# EAGLE board Nu6509_v2 (EAGLE 7.7.0)
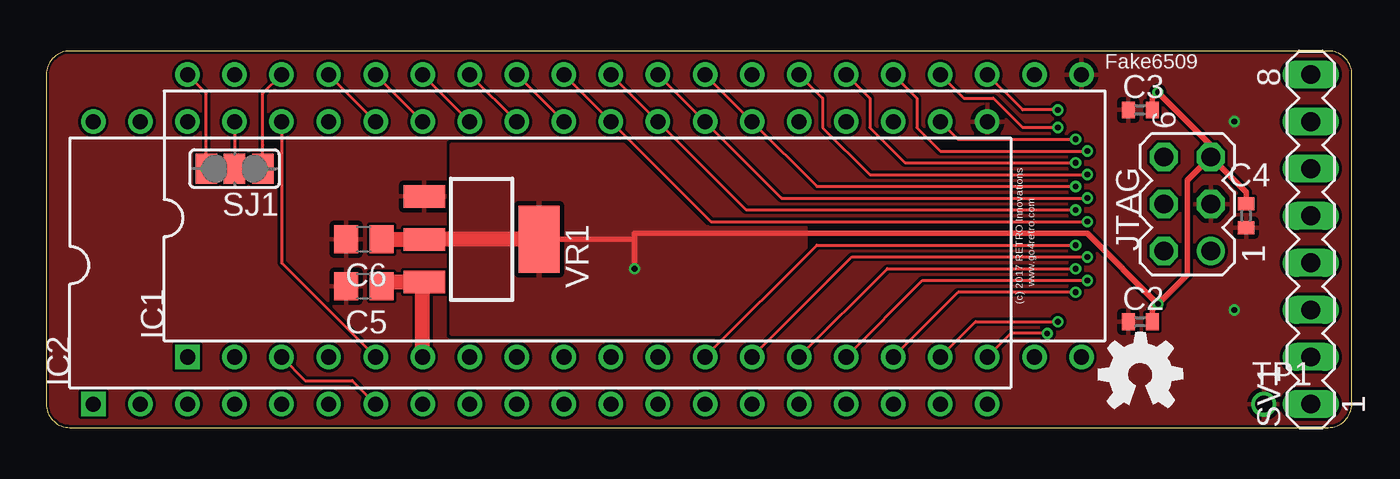
[diagram p0: board, top side]
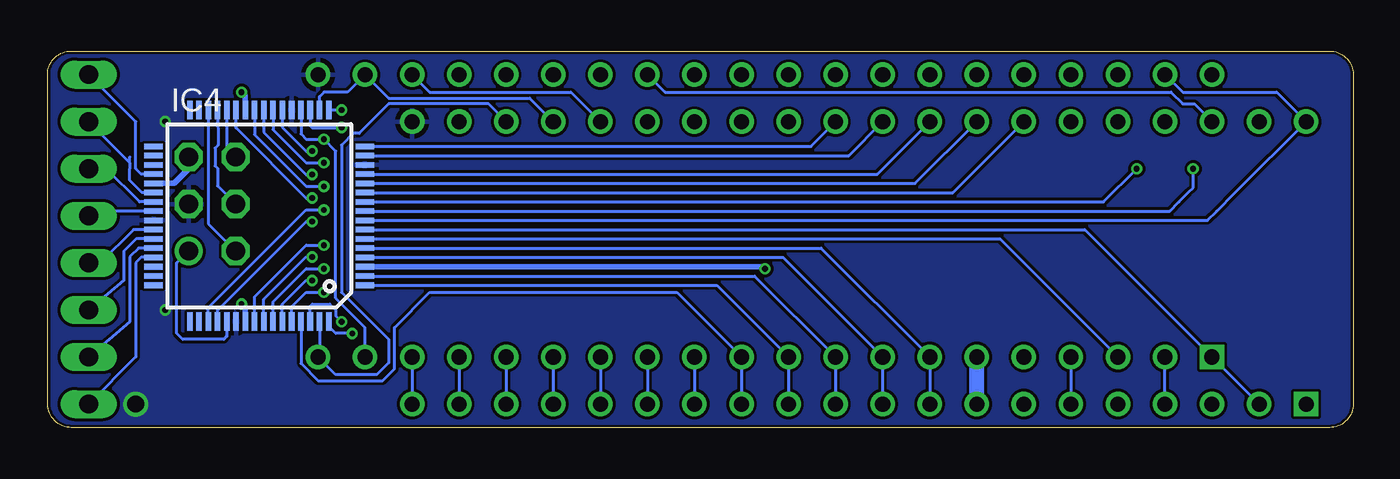
[diagram p1: board, bottom side, seen from below]

Size 70.48 x 20.32 mm. Coordinates in mm from the lower left corner, seen from the top.
Outline: 0,19.05 0,1.27 arc90 1.27,0 69.2,0 arc90 70.47,1.27 70.48,19.05 arc90 69.21,20.32 1.27,20.32 arc90 0,19.05
Copper layers (1*16): Top 0.035mm / dielectric 1.5mm / Bottom 0.035mm
Design rules "hackvana": minimum track width 6mil, minimum drill 0.3mm, track to track 6mil, track to pad 6mil, pad to pad 6mil, via to via 6mil, smd to smd 0mil, copper to edge 6mil, drill to drill 6mil, minimum pad ring 10mil, minimum via ring 6mil, stop-mask expansion 2mil, vias tented up to drill 100mil, thermal gap 10mil

## Footprints (pad centres in the part's own frame; a part is rotated, then mirrored left to right if it is on the bottom)
C0402 = smd 0.7 x 0.9: 1 -0.65,0; 2 0.65,0
C0805 = smd 1.3 x 1.5: 1 -0.95,0; 2 0.95,0
DIL40-ROUNDPAD = drill 0.813 square: 1 -24.13,-7.62 | drill 0.813: 2 -21.59,-7.62; 3 -19.05,-7.62; 4 -16.51,-7.62; 5 -13.97,-7.62; 6 -11.43,-7.62; 7 -8.89,-7.62; 8 -6.35,-7.62; 9 -3.81,-7.62; 10 -1.27,-7.62; 11 1.27,-7.62; 12 3.81,-7.62; 13 6.35,-7.62; 14 8.89,-7.62; 15 11.43,-7.62; 16 13.97,-7.62; 17 16.51,-7.62; 18 19.05,-7.62; 19 21.59,-7.62; 20 24.13,-7.62; 21 24.13,7.62; 22 21.59,7.62; 23 19.05,7.62; 24 16.51,7.62; 25 13.97,7.62; 26 11.43,7.62; 27 8.89,7.62; 28 6.35,7.62; 29 3.81,7.62; 30 1.27,7.62; 31 -1.27,7.62; 32 -3.81,7.62; 33 -6.35,7.62; 34 -8.89,7.62; 35 -11.43,7.62; 36 -13.97,7.62; 37 -16.51,7.62; 38 -19.05,7.62; 39 -21.59,7.62; 40 -24.13,7.62
VQFP64 = smd 1 x 0.3: 1 -5.7,3.75; 2 -5.7,3.25; 3 -5.7,2.75; 4 -5.7,2.25; 5 -5.7,1.75; 6 -5.7,1.25; 7 -5.7,0.75; 8 -5.7,0.25; 9 -5.7,-0.25; 10 -5.7,-0.75; 11 -5.7,-1.25; 12 -5.7,-1.75; 13 -5.7,-2.25; 14 -5.7,-2.75; 15 -5.7,-3.25; 16 -5.7,-3.75; 33 5.7,-3.75; 34 5.7,-3.25; 35 5.7,-2.75; 36 5.7,-2.25; 37 5.7,-1.75; 38 5.7,-1.25; 39 5.7,-0.75; 40 5.7,-0.25; 41 5.7,0.25; 42 5.7,0.75; 43 5.7,1.25; 44 5.7,1.75; 45 5.7,2.25; 46 5.7,2.75; 47 5.7,3.25; 48 5.7,3.75 | smd 0.3 x 1: 17 -3.75,-5.7; 18 -3.25,-5.7; 19 -2.75,-5.7; 20 -2.25,-5.7; 21 -1.75,-5.7; 22 -1.25,-5.7; 23 -0.75,-5.7; 24 -0.25,-5.7; 25 0.25,-5.7; 26 0.75,-5.7; 27 1.25,-5.7; 28 1.75,-5.7; 29 2.25,-5.7; 30 2.75,-5.7; 31 3.25,-5.7; 32 3.75,-5.7; 49 3.75,5.7; 50 3.25,5.7; 51 2.75,5.7; 52 2.25,5.7; 53 1.75,5.7; 54 1.25,5.7; 55 0.75,5.7; 56 0.25,5.7; 57 -0.25,5.7; 58 -0.75,5.7; 59 -1.25,5.7; 60 -1.75,5.7; 61 -2.25,5.7; 62 -2.75,5.7; 63 -3.25,5.7; 64 -3.75,5.7
MA03-2 = drill 1.016: 1 -2.54,-1.27 | drill 1.016 octagon: 2 -2.54,1.27; 3 0,-1.27; 4 0,1.27; 5 2.54,-1.27; 6 2.54,1.27
SJ_2 = smd 1.168 x 1.6: 1 -1.524,0; 2 0,0; 3 1.524,0
MA08-1 = drill 1.016 long: 1 -8.89,0; 2 -6.35,0; 3 -3.81,0; 4 -1.27,0; 5 1.27,0; 6 3.81,0; 7 6.35,0; 8 8.89,0
B1,27 = smd 1.27 x 1.27: TP 0,0
SOT223 = smd 1.219 x 2.235: 1 -2.311,-3.099; 2 0,-3.099; 3 2.311,-3.099 | smd 3.6 x 2.2: 4 0,3.099

## Placement (x,y rotation side)
C2  .1  [C0402]  59.05,5.71 180 top
C3  .1  [C0402]  59.05,17.14 180 top
C4  .1  [C0402]  64.77,11.43 270 top
C5  10  [C0805]  17.14,7.62 180 top
C6  22  [C0805]  17.14,10.16 180 top
GOLD_ORB_SM1  Open Source Hardware  [OSHW_5MM]  59.05,2.86 0 top
IC1  6509  [DIL40-ROUNDPAD]  31.75,11.43 0 top
IC2  65C02  [DIL40-ROUNDPAD]  26.67,8.89 0 top
IC4  XC9572XL  [VQFP64]  59.05,11.43 180 bottom
JTAG  [MA03-2]  61.59,12.06 90 top
SJ1  [SJ_2]  10.16,13.97 180 top
SV1  [MA08-1]  68.26,10.16 90 top
TP1  PTR1B1,27  [B1,27]  65.72,1.27 0 top
VR1  [SOT223]  23.5,10.16 270 top

## Library data of the parts
C2-C6 = rcl
GOLD_ORB_SM1 = oshw
IC1 IC2 = commodore
IC4 = xilinx_xc95XXXxl
JTAG SV1 = con-lstb; OC_FARNELL: unknown; OC_NEWARK: unknown
SJ1 = jumper
TP1 = testpad
VR1 = SparkFun

## Nets
!IRQ: IC1.2 IC2.4
!NMI: IC1.4 IC2.6
!RDY: IC1.1 IC2.2 IC4.7
!RESET: IC1.39 IC2.40 IC4.8
!SO: IC1.28 IC2.38
+3V3: C2.1 C3.1 C4.1 C6.1 IC4.3 IC4.26 IC4.37 IC4.55 JTAG.5 VR1.2 VR1.4
A0: IC1.7 IC2.9 IC4.5
A1: IC1.8 IC2.10 IC4.4
A2: IC1.9 IC2.11 IC4.2
A3: IC1.10 IC2.12 IC4.1
A4: IC1.11 IC2.13 IC4.61
A5: IC1.12 IC2.14 IC4.56
A6: IC1.13 IC2.15 IC4.57
A7: IC1.14 IC2.16 IC4.58
A8: IC1.15 IC2.17 IC4.59
A9: IC1.16 IC2.18 IC4.60
A10: IC1.17 IC2.19 IC4.62
A11: IC1.18 IC2.20 IC4.64
A12: IC1.19 IC2.22 IC4.20
A13: IC1.20 IC2.23 IC4.63
A14: IC1.22 IC2.24 IC4.18
A15: IC1.23 IC2.25 IC4.17
AEC: IC1.5 IC2.36
D0: IC1.36 IC2.33 IC4.12
D1: IC1.35 IC2.32 IC4.13
D2: IC1.34 IC2.31 IC4.15
D3: IC1.33 IC2.30 IC4.16
D4: IC1.32 IC2.29 IC4.52
D5: IC1.31 IC2.28 IC4.51
D6: IC1.30 IC2.27 IC4.27
D7: IC1.29 IC2.26 IC4.25
GND: C2.2 C3.2 C4.2 C5.2 C6.2 IC1.21 IC2.21 IC4.14 IC4.21 IC4.41 IC4.54 JTAG.3 TP1.TP VR1.1
N$1: IC4.40 SV1.5
N$2: IC4.42 SV1.4
N$4: IC4.43 SV1.3
N$5: IC4.44 SV1.2
N$6: IC4.45 SV1.1
N$7: IC4.39 SV1.6
N$8: IC4.38 SV1.7
N$9: IC4.36 SV1.8
P0: IC1.27 IC4.24
P1: IC1.26 IC4.23
P2: IC1.25 IC4.22
P3: IC1.24 IC4.19
PHI1I_6509: IC1.38 IC4.10 SJ1.1
PHI2I_6502: IC2.37 SJ1.2
PHI2I_6509: IC1.40 IC4.9 SJ1.3
PHI2O_6502: IC2.39
R/!W: IC1.37 IC2.34 IC4.11
SYNC: IC1.3 IC2.7 IC4.6
TCK: IC4.30 JTAG.2
TDI: IC4.28 JTAG.6
TDO: IC4.53 JTAG.1
TMS: IC4.29 JTAG.4
VCC: C5.1 IC1.6 IC2.8 VR1.3

## Tracks (layer width: path | path; a pad name or v marks a point on that pad's centre or on a via)
!IRQ
  Bottom 0.152: IC2.4 IC1.2
!NMI
  Bottom 0.152: IC1.4 IC2.6
!RDY
  Bottom 0.152: IC2.2 IC1.1 14.49,10.68 IC4.7
!RESET
  Bottom 0.152: IC1.39 9.21,18.1 4.13,18.1 IC2.40 6.35,12.7 7.37,11.68 7.87,11.18 IC4.8
!SO
  Bottom 0.152: IC1.28 37.15,18.1 9.84,18.1 9.21,17.46 8.57,17.46 IC2.38
+3V3  (via drill 0.3)
  Top 0.305: v31.75,8.57 31.75,10.16 | 31.75,10.16 VR1.4 | C2.1 59.7,6.37 v60.01,6.67 | v60.01,6.67 61.59,8.26 61.59,13.34 JTAG.5 | C4.1 64.77,12.7 JTAG.5 | C3.1 59.7,17.8 v60.01,18.1 62.87,15.24 JTAG.5 | 31.75,10.16 31.75,10.48 56.2,10.48 v60.01,6.67
  Top 0.813: VR1.4 VR1.2 C6.1
  Bottom 0.305: IC4.3 31.75,8.68 v31.75,8.57 | v60.01,6.67 59.8,6.46 IC4.55 | IC4.37 63.66,13.18 62.87,13.97 JTAG.5 | IC4.26 59.8,17.89 v60.01,18.1
  pour Top: 21.91,15.24 21.91,5.08 36.51,5.08 40.96,9.53 40.96,10.79 35.56,10.79 31.11,15.24
A0
  Bottom 0.152: IC2.9 IC1.7 28.73,9.68 IC4.5
A1
  Bottom 0.152: IC2.10 IC1.8 30.77,9.18 IC4.4
A2
  Bottom 0.152: IC2.11 IC1.9 32.31,8.18 IC4.2
A3
  Bottom 0.152: IC2.12 IC1.10 34.35,7.68 IC4.1
A4
  Bottom 0.152: IC2.13 IC1.11 36.51,7.3 49.85,7.3 51.75,5.4 51.75,3.17 52.39,2.54 55.88,2.54 56.8,3.46 IC4.61
A5  (via drill 0.3)
  Top 0.152: IC1.12 41.59,9.84 v55.56,9.84
  Bottom 0.152: IC1.12 IC2.14 | v55.56,9.84 56.52,9.84 59.3,7.05 IC4.56
A6  (via drill 0.3)
  Top 0.152: IC1.13 43.5,9.21 v56.2,9.21
  Bottom 0.152: IC1.13 IC2.15 | v56.2,9.21 56.52,9.21 58.8,6.92 IC4.57
A7  (via drill 0.3)
  Top 0.152: IC1.14 45.4,8.57 v55.56,8.57
  Bottom 0.152: IC1.14 IC2.16 | v55.56,8.57 56.52,8.57 58.3,6.78 IC4.58
A8  (via drill 0.3)
  Top 0.152: IC1.15 47.31,7.94 v56.2,7.94
  Bottom 0.152: IC1.15 IC2.17 | v56.2,7.94 56.52,7.94 57.8,6.65 IC4.59
A9  (via drill 0.3)
  Top 0.152: IC1.16 49.21,7.3 v55.56,7.3
  Bottom 0.152: IC1.16 IC2.18 | v55.56,7.3 56.52,7.3 57.3,6.51 IC4.60
A10  (via drill 0.3)
  Top 0.152: IC1.17 50.16,5.71 v54.61,5.71
  Bottom 0.152: IC1.17 IC2.19 | v54.61,5.71 54.93,6.03 54.93,6.35 55.24,6.67 56.2,6.67 56.3,6.56 IC4.62
A11  (via drill 0.3)
  Top 0.152: IC1.18 52.07,5.08 v54.03,5.08
  Bottom 0.152: IC1.18 IC2.20 | v54.03,5.08 54.93,5.08 55.3,5.46 IC4.64
A12  (via drill 0.3)
  Top 0.152: IC2.22 49.21,15.56 v55.56,15.56
  Bottom 0.152: IC4.20 56.8,15.85 56.52,15.56 v55.56,15.56 54.93,14.92 54.93,6.99 53.34,5.4 IC1.19
A13
  Bottom 0.152: IC2.23 46.67,17.46 52.07,17.46 53.66,15.88 53.98,15.88 54.61,15.24 54.61,7.3 52.07,4.76 52.07,3.49 52.7,2.86 54.93,2.86 IC1.20 55.8,3.81 IC4.63
A14
  Bottom 0.152: IC2.24 44.45,17.78 52.07,17.78 IC1.22 54.29,18.1 55.56,18.1 55.8,17.86 IC4.18
A15  (via drill 0.3)
  Top 0.152: IC1.23 52.7,17.14 v54.61,17.14
  Bottom 0.152: IC1.23 49.85,18.1 42.23,18.1 IC2.25 | IC4.17 55.29,17.14 v54.61,17.14
AEC
  Top 0.152: IC2.36 12.7,8.89 IC1.5
D0
  Top 0.152: IC1.36 IC2.33
  Bottom 0.152: IC4.12 23.65,13.18 IC2.33
D1
  Top 0.152: IC1.35 IC2.32
  Bottom 0.152: IC4.13 25.69,13.68 IC2.32
D2
  Top 0.152: IC1.34 IC2.31
  Bottom 0.152: IC2.31 27.23,14.68 IC4.15
D3
  Top 0.152: IC1.33 IC2.30
  Bottom 0.152: IC2.30 29.27,15.18 IC4.16
D4  (via drill 0.3)
  Top 0.152: IC1.32 IC2.29 35.88,11.11 v56.2,11.11
  Bottom 0.152: v56.2,11.11 56.52,11.11 61.3,6.32 IC4.52
D5  (via drill 0.3)
  Top 0.152: IC1.31 IC2.28 37.78,11.75 v55.56,11.75
  Bottom 0.152: v55.56,11.75 56.52,11.75 61.8,6.46 IC4.51
D6  (via drill 0.3)
  Top 0.152: IC1.30 IC2.27 39.69,12.38 v56.2,12.38
  Bottom 0.152: v56.2,12.38 56.52,12.38 60.3,16.17 IC4.27
D7  (via drill 0.3)
  Top 0.152: IC1.29 IC2.26 41.59,13.02 v55.56,13.02
  Bottom 0.152: v55.56,13.02 56.52,13.02 59.3,15.81 IC4.25
GND  (via drill 0.3, 0.9)
  other vias: 64.14,16.51 64.14,6.35 65.72,1.27
  pour Top (rank 2): 1.27,20.32 69.22,20.32 arc-90 70.48,19.05 70.48,1.27 arc-90 69.22,0 1.27,0 arc-90 0,1.27 0,19.05 arc-90
  pour Bottom (rank 2): 1.27,20.32 69.22,20.32 arc-90 70.48,19.05 70.48,1.27 arc-90 69.22,0 1.27,0 arc-90 0,1.27 0,19.05 arc-90
N$1
  Bottom 0.152: IC4.40 68.01,11.68 SV1.5
N$2
  Bottom 0.152: IC4.42 65.84,10.68 67.63,8.89 SV1.4
N$4
  Bottom 0.152: IC4.43 65.7,10.18 66.36,9.53 66.36,7.94 SV1.3
N$5
  Bottom 0.152: IC4.44 65.57,9.68 66.04,9.21 66.04,5.71 SV1.2
N$6
  Bottom 0.152: IC4.45 65.43,9.18 65.72,8.89 65.72,3.81 SV1.1
N$7
  Bottom 0.152: IC4.39 65.52,12.18 67.31,13.97 SV1.6
N$8
  Bottom 0.152: IC4.38 65.39,12.68 66.04,13.34 66.04,13.97 66.04,14.29 | 66.04,14.29 66.04,14.61 | SV1.7 66.04,14.29
N$9
  Bottom 0.152: IC4.36 65.43,13.68 65.72,13.97 65.72,16.51 SV1.8
P0  (via drill 0.3)
  Top 0.152: IC1.27 41.91,17.78 41.91,16.19 44.45,13.65 v56.2,13.65
  Bottom 0.152: v56.2,13.65 56.52,13.65 58.8,15.94 IC4.24
P1  (via drill 0.3)
  Top 0.152: IC1.26 44.45,17.78 44.45,16.19 46.35,14.29 v55.56,14.29
  Bottom 0.152: v55.56,14.29 56.52,14.29 58.3,16.08 IC4.23
P2  (via drill 0.3)
  Top 0.152: IC1.25 46.99,17.78 46.99,16.19 48.26,14.92 v56.2,14.92
  Bottom 0.152: v56.2,14.92 56.52,14.92 57.8,16.21 IC4.22
P3  (via drill 0.3)
  Top 0.152: IC1.24 49.53,17.78 51.12,17.78 52.7,16.19 v54.61,16.19
  Bottom 0.152: IC4.19 56.3,16.3 56.2,16.19 v54.61,16.19
PHI1I_6509  (via drill 0.3)
  Top 0.152: IC1.38 11.68,18.03 11.68,15.24 SJ1.1
  Bottom 0.152: IC4.10 13.47,12.18 SJ1.1
  other vias: 11.68,13.97
PHI2I_6502
  Top 0.152: IC2.37 SJ1.2
PHI2I_6509  (via drill 0.3)
  Top 0.152: SJ1.3 8.64,18.03 IC1.40
  Bottom 0.152: SJ1.3 8.64,12.95 8.89,12.7 9.41,12.18 9.91,11.68 IC4.9
  other vias: 8.64,13.97
R/!W
  Top 0.152: IC1.37 IC2.34
  Bottom 0.152: IC4.11 21.61,12.68 IC2.34
SYNC
  Top 0.152: IC1.3 13.97,2.54 16.51,2.54 IC2.7
  Bottom 0.152: IC1.3 19.07,10.18 IC4.6
TCK
  Bottom 0.152: IC4.30 61.8,11.01 JTAG.2
TDI
  Bottom 0.152: IC4.28 60.8,15.09 JTAG.6
TDO
  Bottom 0.152: IC4.53 60.8,4.92 60.96,4.76 63.18,4.76 63.5,5.08 63.5,8.89 JTAG.1
TMS
  Bottom 0.152: IC4.29 61.28,15.24 61.44,15.08 61.44,14.13 61.3,14 61.3,13.04 JTAG.4
VCC
  Top 0.813: IC1.6 20.32,7.85 VR1.3 18.09,7.85 C5.1
  Bottom 0.813: IC2.8 IC1.6

## Text on the board
tNames: Fake6509 | www.go4retro.com | (c) 2017 RETRO Innovations